# EAGLE board mowgli (EAGLE 7.6.0)

Size 71.12 x 22.86 mm. Coordinates in mm from the lower left corner, seen from the top.
Outline: 0,0 0,22.86 71.12,22.86 71.12,0 0,0
Copper layers (1*16): Top 0.035mm / dielectric 1.5mm / Bottom 0.035mm
Design rules "default": minimum track width 10mil, minimum drill 24mil, track to track 8mil, track to pad 8mil, pad to pad 8mil, via to via 8mil, smd to smd 8mil, copper to edge 40mil, drill to drill 8mil, minimum pad ring 10mil, minimum via ring 8mil, stop-mask expansion 4mil, vias tented up to drill 0mil, thermal gap 10mil
Net classes: 1 power: width 0.381 mm, clearance 0.254 mm

## Footprints (pad centres in the part's own frame; a part is rotated, then mirrored left to right if it is on the bottom)
1X13 = drill 1.016 pad 1.88: 1 0,0; 2 2.54,0; 3 5.08,0; 4 7.62,0; 5 10.16,0; 6 12.7,0; 7 15.24,0; 8 17.78,0; 9 20.32,0; 10 22.86,0; 11 25.4,0; 12 27.94,0; 13 30.48,0
1X01_ROUND = drill 1 pad 1.676: 1 0,0
C025-024X044 = drill 0.813 octagon: 1 -1.27,0; 2 1.27,0
E1,8-4 = drill 0.711 pad 1.168: + -0.889,0 | drill 0.711 pad 1.168 octagon: - 0.889,0
MA06-1 = drill 1.016 long: 1 0,0; 2 2.54,0; 3 5.08,0; 4 7.62,0; 5 10.16,0; 6 12.7,0
DIL28-3 = drill 0.813 long: 1 -16.51,-3.81; 2 -13.97,-3.81; 3 -11.43,-3.81; 4 -8.89,-3.81; 5 -6.35,-3.81; 6 -3.81,-3.81; 7 -1.27,-3.81; 8 1.27,-3.81; 9 3.81,-3.81; 10 6.35,-3.81; 11 8.89,-3.81; 12 11.43,-3.81; 13 13.97,-3.81; 14 16.51,-3.81; 15 16.51,3.81; 16 13.97,3.81; 17 11.43,3.81; 18 8.89,3.81; 19 6.35,3.81; 20 3.81,3.81; 21 1.27,3.81; 22 -1.27,3.81; 23 -3.81,3.81; 24 -6.35,3.81; 25 -8.89,3.81; 26 -11.43,3.81; 27 -13.97,3.81; 28 -16.51,3.81
TO92 = drill 0.813 octagon: 1 -1.27,0; 2 0,1.905; 3 1.27,0
1X01 = drill 1.016 pad 1.88: 1 0,0
LED3MM = drill 0.813 octagon: A -1.27,0; K 1.27,0
0204/7 = drill 0.813 octagon: 1 -3.81,0; 2 3.81,0
RFMHCW_SMT = smd 1.5 x 1: 1P 8.1,-7; 2P 8.1,-5; 3P 8.1,-3; 4P 8.1,-1; 5P 8.1,1; 6P 8.1,3; 7P 8.1,5; 8P 8.1,7; 9P -8.1,7; 10P -8.1,5; 11P -8.1,3; 12P -8.1,1; 13P -8.1,-1; 14P -8.1,-3; 15P -8.1,-5; 16P -8.1,-7
RESONATOR-PTH = drill 0.8 pad 1.88: 1 -2.54,0; 2 0,0; 3 2.54,0
U.FL = smd 2.2 x 1.05: 1 0,1.375; 2 0,-1.375 | smd 0.8 x 1: 3 1.525,0
JSTPH2 = smd 1 x 4.6: 1 -1,-3.7; 2 1,-3.7 | smd 1.6 x 3.4: NC1 -3.4,1.5; NC2 3.4,1.5

## Placement (x,y rotation side)
ANALOGSIDE  M13  [1X13]  46.99,21.59 180 top
ANT  [1X01_ROUND]  67.94,19.68 0 top
C1  0.1µ  [C025-024X044]  3.17,20.95 180 top
C2  0.1µ  [C025-024X044]  8.26,19.68 90 top
C3  0.1µ  [C025-024X044]  23.88,16.76 0 top
C4  0.1µ  [C025-024X044]  30.23,16.76 180 top
C5  10µ  [E1,8-4]  12.7,20.32 0 top
DIGITALSIDE  M13  [1X13]  46.99,1.27 180 top
FTDI  FTDI  [MA06-1]  2.54,3.81 90 top
IC1  ATMEGA  [DIL28-3]  32.89,9.53 0 top
IC2  MCP1702-33  [TO92]  7.62,13.97 0 top
JP2  M01PTH  [1X01]  18.16,16.64 0 top
LED  [LED3MM]  51.05,20.19 90 top
R1  10k  [0204/7]  12.06,13.34 270 top
R2  10k  [0204/7]  47.12,16.51 180 top
U4  [RFMHCW_SMT]  60.96,9.53 90 top
X1  16 MHz  [RESONATOR-PTH]  38.35,16.64 0 top
X2  uFL  [U.FL]  67.94,15.88 90 bottom
X3  JSTPH  [JSTPH2]  8.89,3.81 180 top

## Library data of the parts
ANALOGSIDE DIGITALSIDE JP2 = SparkFun-Connectors
ANT U4 X2 X3 = microbuilder
C1-C5 R1 R2 = resistor
FTDI IC2 = JeeLabs
IC1 = atmega8
LED = led
X1 = SparkFun

## Nets
A0: ANALOGSIDE.1 IC1.23
A1: ANALOGSIDE.2 IC1.24
A2: ANALOGSIDE.3 IC1.25
A3: ANALOGSIDE.4 IC1.26
A4_SDA: ANALOGSIDE.5 IC1.27
A5_SCL: ANALOGSIDE.6 IC1.28
A6: ANALOGSIDE.7
A7: ANALOGSIDE.8
ANT: ANT.1 U4.1P X2.3
AREF: C3.1 IC1.21 JP2.1
D0_RX: ANALOGSIDE.9 FTDI.4 IC1.2
D1_TX: ANALOGSIDE.10 FTDI.5 IC1.3
D2: DIGITALSIDE.12 IC1.4 U4.6P
D3: DIGITALSIDE.11 IC1.5
D4: DIGITALSIDE.10 IC1.6
D5: DIGITALSIDE.9 IC1.11
D6: DIGITALSIDE.8 IC1.12
D7: DIGITALSIDE.7 IC1.13
D8: DIGITALSIDE.6 IC1.14
D9: DIGITALSIDE.5 IC1.15 R2.2
D10_SS: DIGITALSIDE.4 IC1.16 U4.13P
D11_MOSI: DIGITALSIDE.3 IC1.17 U4.11P
D12_MISO: DIGITALSIDE.2 IC1.18 U4.10P
D13_SCK: DIGITALSIDE.1 IC1.19 U4.12P
GND [power]: ANALOGSIDE.13 C2.2 C3.2 C4.2 C5.- FTDI.1 IC1.8 IC1.22 IC2.1 LED.K U4.2P U4.9P U4.16P X1.2 X2.1 X2.2 X3.1
N$1: IC1.9 X1.1
N$2: LED.A R2.1
N$20: C1.2 FTDI.6
N$21: IC1.10 X1.3
PWR [power]: ANALOGSIDE.12 C2.1 FTDI.3 IC2.2 X3.2
RST: C1.1 DIGITALSIDE.13 IC1.1 R1.1
VCC [power]: ANALOGSIDE.11 C4.1 C5.+ IC1.7 IC1.20 IC2.3 R1.2 U4.5P

## Tracks (layer width: path | path; a pad name or v marks a point on that pad's centre or on a via)
A0  (1 unrouted)
A1  (1 unrouted)
A2  (1 unrouted)
A3  (1 unrouted)
A4_SDA  (1 unrouted)
A5_SCL  (1 unrouted)
ANT  (2 unrouted)
AREF  (2 unrouted)
D0_RX  (2 unrouted)
D1_TX  (2 unrouted)
D2  (2 unrouted)
D3  (1 unrouted)
D4  (1 unrouted)
D5  (1 unrouted)
D6  (1 unrouted)
D7  (1 unrouted)
D8  (1 unrouted)
D9  (2 unrouted)
D10_SS  (2 unrouted)
D11_MOSI  (2 unrouted)
D12_MISO  (2 unrouted)
D13_SCK  (2 unrouted)
GND  (16 unrouted)
N$1  (1 unrouted)
N$2  (1 unrouted)
N$20  (1 unrouted)
N$21  (1 unrouted)
PWR  (4 unrouted)
RST  (3 unrouted)
VCC  (7 unrouted)

## Text on the board
Dimension: - | LED | DTR | C2 | GND | VIN | 3.3 | TX | RX | NC | NC | A5 | A4 | A3 | A2 | A1 | A0 | ANT | DTR | C1 | C5 | AREF | C3 | C4 | X1 | + | R2 | RX | R1 | RX | IC2 | VIN | IC1 | GND | RST | D2 | D3 | D4 | D5 | D6 | D7 | D8 | D9 | D10 | D11 | D12 | D13 | X3 | GND